# EAGLE board con_brd (EAGLE 9.6.2)
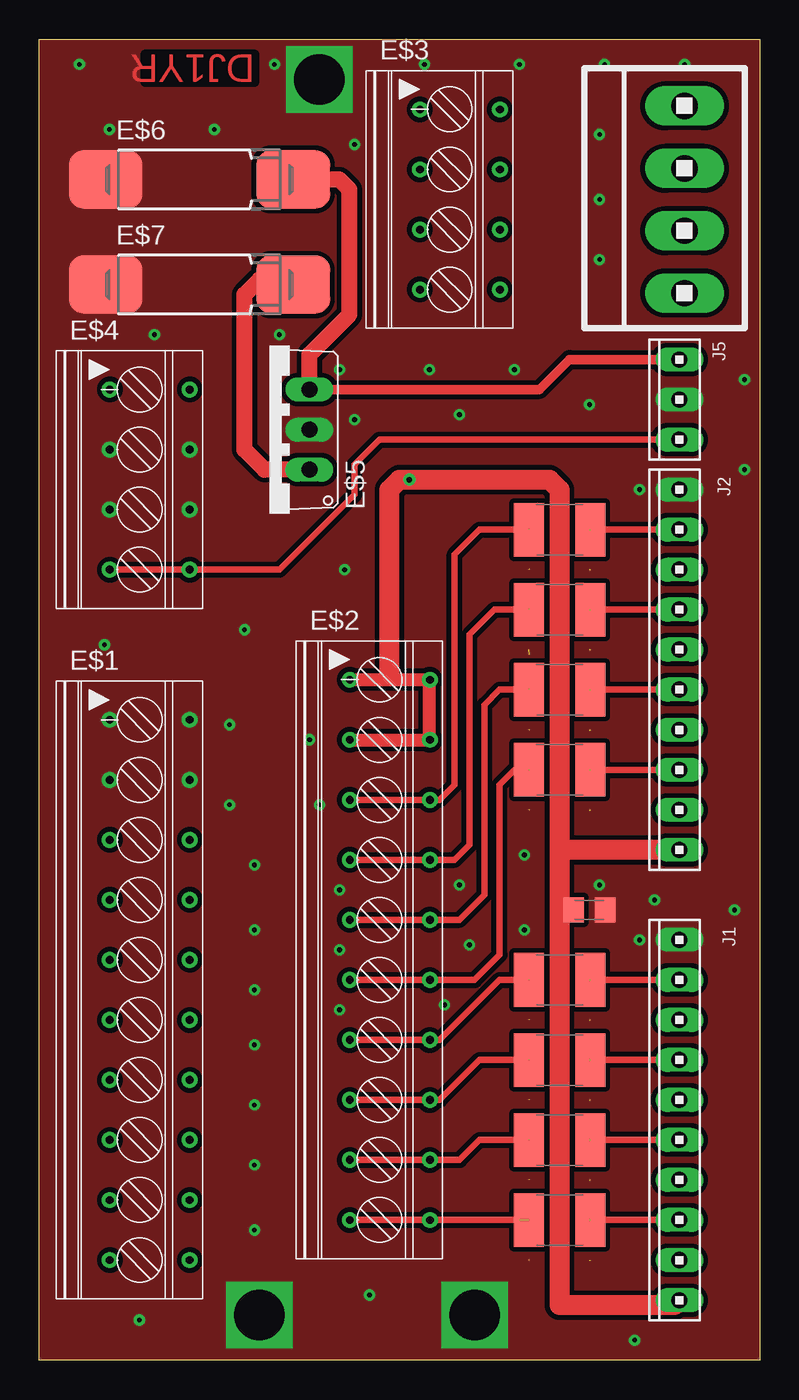
[diagram p0: board, top side]
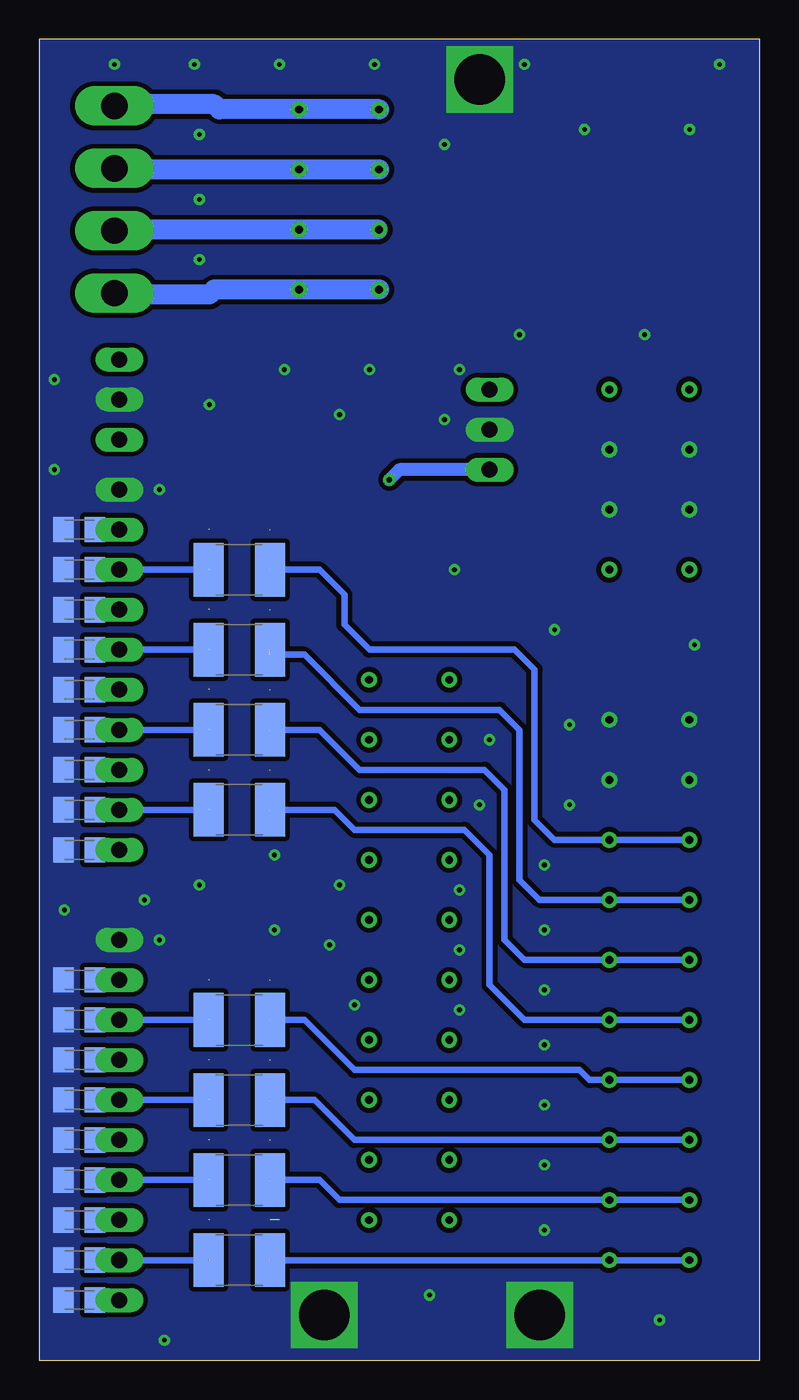
[diagram p1: board, bottom side, seen from below]

Size 45.72 x 83.82 mm. Coordinates in mm from the lower left corner, seen from the top.
Outline: 0,0 0,83.82 45.72,83.82 45.72,0 0,0
Copper layers (1*16): Top 0.035mm / dielectric 1.5mm / Bottom 0.035mm
Design rules "default *": minimum track width 6mil, minimum drill 0.35mm, track to track 6mil, track to pad 6mil, pad to pad 6mil, via to via 6mil, smd to smd 6mil, copper to edge 0mil, drill to drill 6mil, minimum pad ring 10mil, minimum via ring 8mil, stop-mask expansion 4mil, vias tented up to drill 0mil, thermal gap 10mil

## Footprints (pad centres in the part's own frame; a part is rotated, then mirrored left to right if it is on the bottom)
C0805K = smd 1.3 x 1.6: 1 -1,0; 2 1,0
1705621 = drill 0.5 pad 0.9: 1.1 -17.145,-1.25; 1.2 -17.145,3.83; 2.1 -13.335,-1.25; 2.2 -13.335,3.83; 3.1 -9.525,-1.25; 3.2 -9.525,3.83; 4.1 -5.715,-1.25; 4.2 -5.715,3.83; 5.1 -1.905,-1.25; 5.2 -1.905,3.83; 6.1 1.905,-1.25; 6.2 1.905,3.83; 7.1 5.715,-1.25; 7.2 5.715,3.83; 8.1 9.525,-1.25; 8.2 9.525,3.83; 9.1 13.335,-1.25; 9.2 13.335,3.83; 10.1 17.145,-1.25; 10.2 17.145,3.83
1705566 = drill 0.5 pad 0.9: 1.1 -5.715,-1.25; 1.2 -5.715,3.83; 2.1 -1.905,-1.25; 2.2 -1.905,3.83; 3.1 1.905,-1.25; 3.2 1.905,3.83; 4.1 5.715,-1.25; 4.2 5.715,3.83
TO220V = drill 1.016 long: 1 -2.54,-2.54; 2 0,-2.54; 3 2.54,-2.54
085CS_1W = smd 4.7 x 3.7: + 5.95,0; - -5.95,0
10X10MTA = drill 1.016 long: 1 11.43,0; 2 8.89,0; 3 6.35,0; 4 3.81,0; 5 1.27,0; 6 -1.27,0; 7 -3.81,0; 8 -6.35,0; 9 -8.89,0; 10 -11.43,0
1X4MTA = drill 1.676 long: 1 5.944,0; 2 1.981,0; 3 -1.981,0; 4 -5.944,0
10X03MTA = drill 1.016 long: 1 2.54,0; 2 0,0; 3 -2.54,0
L1812 = smd 1.9 x 3.4: 1 -1.95,0; 2 1.95,0

## Placement (x,y rotation side)
C7  [C0805K]  43.18,3.81 180 bottom
C8  [C0805K]  43.18,6.35 180 bottom
C9  [C0805K]  43.18,8.89 180 bottom
C10  [C0805K]  43.18,11.43 180 bottom
C11  [C0805K]  43.18,13.97 180 bottom
C12  [C0805K]  43.18,16.51 180 bottom
C13  [C0805K]  43.18,19.05 180 bottom
C14  [C0805K]  43.18,21.59 180 bottom
C15  [C0805K]  43.18,24.13 180 bottom
C16  [C0805K]  43.18,32.38 180 bottom
C17  [C0805K]  43.18,34.92 180 bottom
C18  [C0805K]  43.18,37.47 180 bottom
C19  [C0805K]  43.18,40.01 180 bottom
C20  [C0805K]  43.18,42.55 180 bottom
C21  [C0805K]  43.18,45.09 180 bottom
C22  [C0805K]  43.18,47.62 180 bottom
C23  [C0805K]  43.18,50.16 180 bottom
C24  [C0805K]  43.18,52.7 180 bottom
C26  [C0805K]  34.92,28.57 0 top
E$1  [1705621]  5.71,23.5 270 top
E$2  [1705621]  20.95,26.04 270 top
E$3  [1705566]  25.4,73.66 270 top
E$4  [1705566]  5.71,55.88 270 top
E$5  [TO220V]  14.61,59.05 90 top
E$6  [085CS_1W]  10.16,74.93 0 top
E$7  [085CS_1W]  10.16,68.26 0 top
J1  [10X10MTA]  40.64,15.24 90 top
J2  [10X10MTA]  40.64,43.81 90 top
J4  [1X4MTA]  40.96,73.66 90 top
J5  [10X03MTA]  40.64,60.96 90 top
L2  [L1812]  33.02,24.13 0 top
L3  [L1812]  33.02,21.59 180 bottom
L4  [L1812]  33.02,19.05 0 top
L5  [L1812]  33.02,16.51 180 bottom
L6  [L1812]  33.02,13.97 0 top
L7  [L1812]  33.02,11.43 180 bottom
L8  [L1812]  33.02,8.89 0 top
L9  [L1812]  33.02,6.35 180 bottom
L10  [L1812]  33.02,52.7 0 top
L11  [L1812]  33.02,50.16 180 bottom
L12  [L1812]  33.02,47.62 0 top
L13  [L1812]  33.02,45.09 180 bottom
L14  [L1812]  33.02,42.55 0 top
L15  [L1812]  33.02,40.01 180 bottom
L16  [L1812]  33.02,37.47 0 top
L17  [L1812]  33.02,34.92 180 bottom

## Library data of the parts
C7-C24 C26 = rcl; SPICEPREFIX: C
E$1-E$4 = con-phoenix-3.81
E$5 = linear
E$6 E$7 = rcl
J1 J2 J4 J5 = con-amp
L2-L17 = rcl; SPICEPREFIX: L

## Nets
+5V: E$5.3 J5.1
+24V: E$5.1 J1.10 J2.10
GND: C7.2 C8.2 C9.2 C10.2 C11.2 C12.2 C13.2 C14.2 C15.2 C16.2 C17.2 C18.2 C19.2 C20.2 C21.2 C22.2 C23.2 C24.2 C26.2 E$1.1.1 E$1.1.2 E$1.2.1 E$1.2.2 E$4.2.1 E$4.2.2 E$4.3.1 E$4.3.2 E$5.2 E$6.- E$7.- J1.1 J2.1 J5.2
N$26: L2.1
N$27: L3.1
N$28: L4.1
N$29: L5.1
N$30: L6.1
N$31: L7.1
N$32: L8.1
N$33: L9.1
N$34: L10.1
N$35: L11.1
N$36: L12.1
N$37: L13.1
N$38: L14.1
N$39: L15.1
N$40: L16.1
N$41: L17.1
N$42: J1.2 L2.2
N$43: J1.3 L3.2
N$44: J1.4 L4.2
N$45: J1.5 L5.2
N$46: J1.6 L6.2
N$47: J1.7 L7.2
N$48: J1.8 L8.2
N$49: J1.9 L9.2
N$50: J2.2 L10.2
N$51: J2.3 L11.2
N$53: J2.5 L13.2
N$54: J2.6 L14.2
N$55: J2.7 L15.2
N$56: J2.8 L16.2
N$57: J2.9 L17.2
N$58: J2.4 L12.2
N$64: J5.3

## Tracks (layer width: path | path; a pad name or v marks a point on that pad's centre or on a via)
11
  Bottom 1.27: 24.13,67.94 34.61,67.94 34.92,67.63 40.96,67.63
12
  Bottom 1.27: 24.24,71.75 40.96,71.75
13
  Bottom 1.27: 24.13,75.56 40.96,75.56
14
  Bottom 1.27: 24.13,79.38 34.29,79.38 34.61,79.69 40.96,79.69
+5V
  Top 0.61: J5.1 33.66,63.5 31.75,61.59 E$5.3
  Top 1.016: E$5.3 17.14,63.82 19.68,66.36 19.68,74.3 19.05,74.93 16.19,74.93
+24V  (via drill 0.35)
  Top 1.016: E$5.1 14.29,56.52 13.02,57.78 13.02,67.63 13.97,68.58 16.19,68.58
  Top 1.27: J2.10 33.02,32.38 | 33.02,32.38 33.02,55.24 32.38,55.88 v23.5,55.88 22.86,55.88 22.23,55.24 22.23,43.5 | 33.02,32.38 33.02,3.49 40.32,3.49 J1.10
  Bottom 0.813: E$5.1 22.86,56.52 v23.5,55.88
GND  (via drill 0.3, 3.2)
  other vias: 38.1,26.67 38.1,55.24 13.97,2.86 30.16,62.87 34.92,60.64 44.77,62.23 35.56,69.85 35.56,73.66 35.56,77.79 35.56,30.16 44.13,28.57 44.77,56.52 13.65,12.38 27.62,2.86 17.78,81.28 7.3,65.09 15.24,65.09 20,59.69 26.67,60.01 24.77,62.87 19.05,62.87 20,77.15 11.11,78.11 4.45,78.11 12.06,35.24 12.06,40.32 13.02,46.35 19.37,50.16 4.13,45.4 39.05,29.21 30.8,32.07 30.8,27.3 27.3,26.35 26.67,30.16 17.78,35.24 17.14,39.37 19.05,29.84 19.05,26.04 25.72,22.54 19.05,22.23 13.65,16.19 13.65,20 13.65,23.5 13.65,27.3 13.65,31.43 13.65,8.26 20.95,4.13 6.35,2.54 37.78,1.27 40.96,82.23 35.88,82.23 30.48,82.23 24.45,82.23 14.92,82.23 2.54,82.23
  pour Top (isolate 0.305, no thermals): 0,0 0,83.82 45.72,83.82 45.72,0
  pour Bottom (isolate 0.305, no thermals): 0,83.82 0,0 45.72,0 45.72,83.82
N$26  (1 unrouted)
  Top 0.406: 31.11,24.13 29.21,24.13 25.4,20.32 19.68,20.32
N$27  (1 unrouted)
  Bottom 0.406: 31.11,21.59 28.89,21.59 25.72,18.41 11.43,18.41 10.79,17.78 4.45,17.78
N$28  (1 unrouted)
  Top 0.406: 31.11,19.05 27.94,19.05 25.4,16.51 19.68,16.51
N$29  (1 unrouted)
  Bottom 0.406: 31.11,16.51 28.26,16.51 25.72,13.97 4.45,13.97
N$30  (1 unrouted)
  Top 0.406: 31.11,13.97 27.94,13.97 26.67,12.7 20.32,12.7
N$31  (1 unrouted)
  Bottom 0.406: 31.11,11.43 27.94,11.43 26.67,10.16 4.45,10.16
N$32  (1 unrouted)
  Top 0.406: 19.68,8.89 30.48,8.89
N$33  (1 unrouted)
  Bottom 0.406: 31.11,6.35 4.45,6.35
N$34  (1 unrouted)
  Top 0.406: 31.11,52.7 27.94,52.7 26.35,51.12 26.35,36.51 25.4,35.56 19.68,35.56
N$35  (1 unrouted)
  Bottom 0.406: 31.11,50.16 27.94,50.16 26.35,48.58 26.35,46.67 24.77,45.09 15.56,45.09 14.29,43.81 14.29,34.29 13.02,33.02 4.45,33.02
N$36  (1 unrouted)
  Top 0.406: 31.11,47.62 28.89,47.62 27.3,46.04 27.3,32.7 26.35,31.75 19.68,31.75
N$37  (1 unrouted)
  Bottom 0.406: 31.11,44.77 28.89,44.77 25.4,41.27 16.51,41.27 15.24,40.01 15.24,30.48 13.97,29.21 4.45,29.21
N$38  (1 unrouted)
  Top 0.406: 31.11,42.55 29.21,42.55 28.26,41.59 28.26,29.53 26.67,27.94 19.68,27.94
N$39  (1 unrouted)
  Bottom 0.406: 31.11,40.01 27.94,40.01 25.4,37.47 17.46,37.47 16.19,36.2 16.19,26.67 14.92,25.4 4.45,25.4
N$40  (1 unrouted)
  Top 0.406: 31.11,37.47 30.16,37.47 29.21,36.51 29.21,25.72 27.62,24.13 19.68,24.13
N$41  (1 unrouted)
  Bottom 0.406: 31.11,34.92 26.99,34.92 25.72,33.66 18.73,33.66 17.14,32.07 17.14,23.81 14.92,21.59 4.45,21.59
N$42  (1 unrouted)
  Top 0.406: J1.2 34.92,24.13
N$43  (1 unrouted)
  Bottom 0.406: 34.92,21.59 J1.3
N$44  (1 unrouted)
  Top 0.406: J1.4 34.92,19.05
N$45  (1 unrouted)
  Bottom 0.406: J1.5 34.92,16.51
N$46  (1 unrouted)
  Top 0.406: J1.6 34.92,13.97
N$47  (1 unrouted)
  Bottom 0.406: J1.7 34.92,11.43
N$48  (1 unrouted)
  Top 0.406: J1.8 34.92,8.89
N$49  (1 unrouted)
  Bottom 0.406: J1.9 34.92,6.35
N$50  (1 unrouted)
  Top 0.406: 34.92,52.7 J2.2
N$51  (1 unrouted)
  Bottom 0.406: J2.3 34.92,50.16
N$53  (1 unrouted)
  Bottom 0.406: J2.5 34.92,45.09
N$54  (1 unrouted)
  Top 0.406: 34.92,42.55 J2.6
N$55  (1 unrouted)
  Bottom 0.406: J2.7 34.92,40.01
N$56  (1 unrouted)
  Top 0.406: 34.92,37.47 J2.8
N$57  (1 unrouted)
  Bottom 0.406: 34.92,34.92 J2.9
N$58  (1 unrouted)
  Top 0.406: 34.92,47.62 J2.4
N$64
  Top 0.406: 4.45,50.16 15.24,50.16 20,54.93 20,56.83 21.59,58.42 J5.3
S$1
  Top 0.813: 19.68,39.37 24.77,39.37 24.77,43.18 19.68,43.18

## Text on the board
Top: DJ1YR